# Altium PCB PCB_DMEM_Mezzanine.PcbDoc (part 2 of 4)
Units mil, origin at the board's own origin, x right, y up, seen from the top; angles counter-clockwise.
Board outline 2250 x 3200 mil, 6 copper layers (Top Layer - Signal, AGND-L1, Int. Signal, Power-GND, AGND-D.Sig., Bottom Layer - Signal), stack 32.112 mil thick; 443 components, 241 nets, 1099 pads, 545 vias.
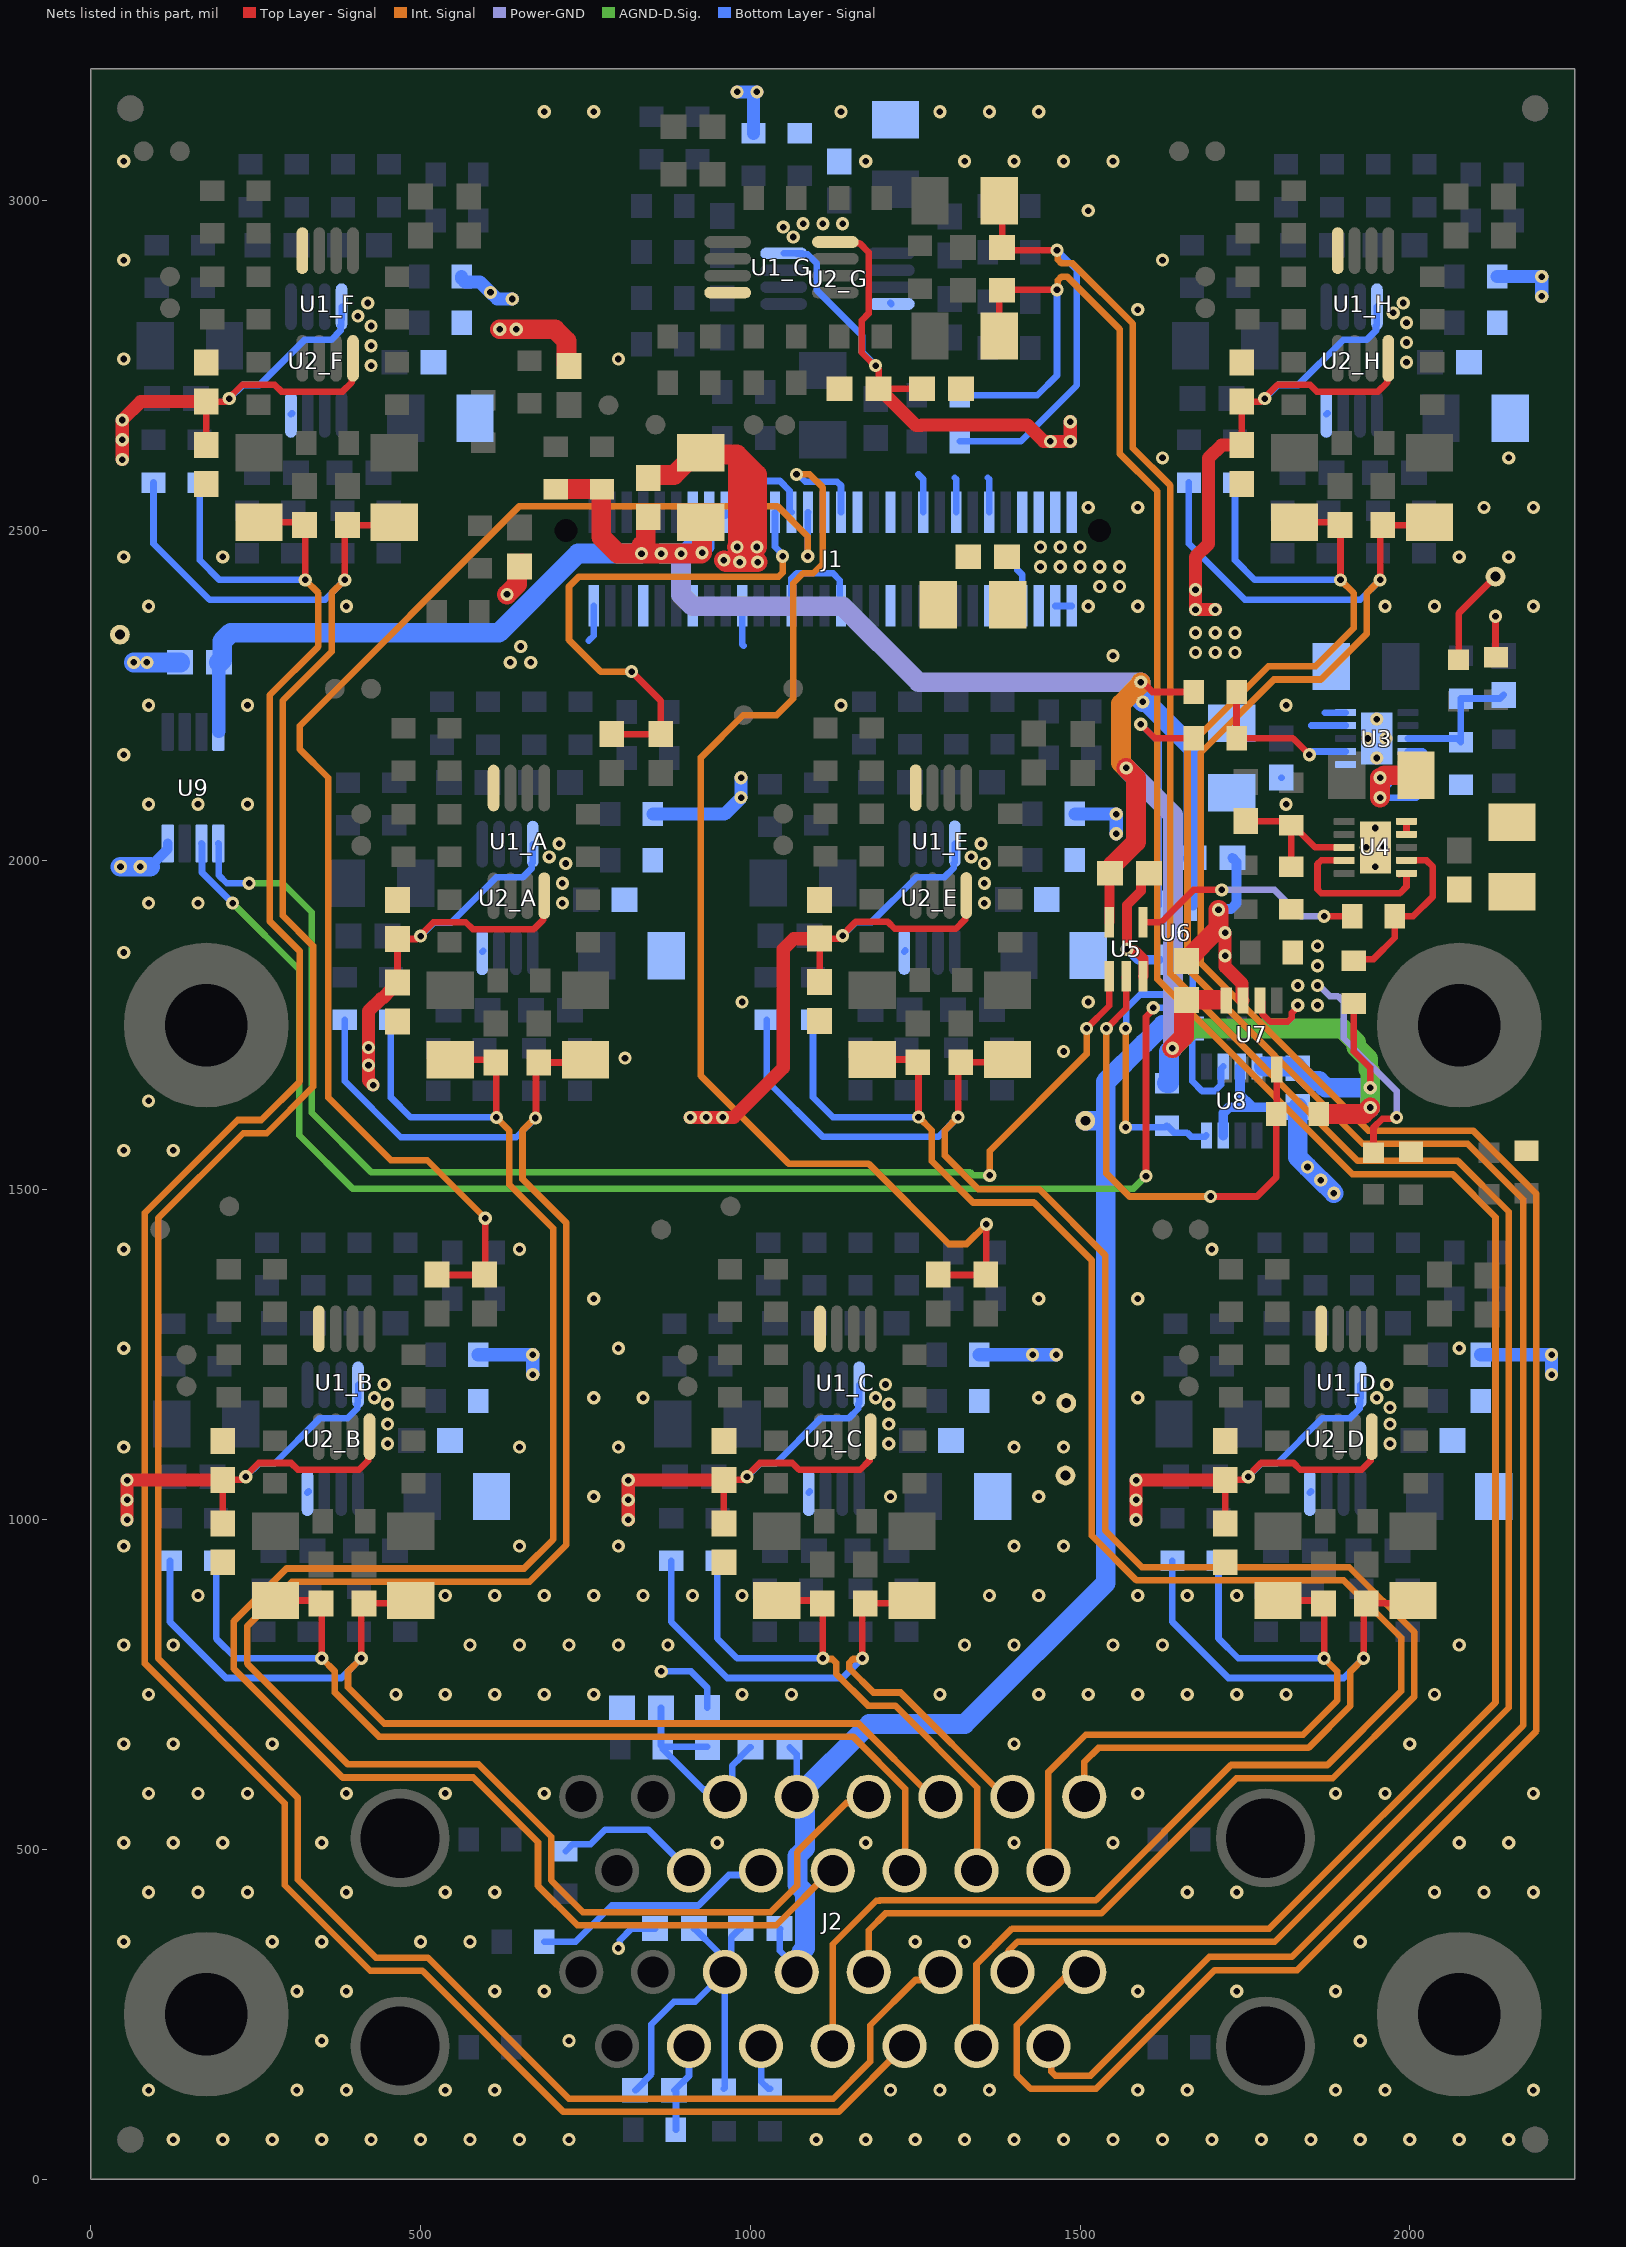
[diagram p6: the nets of this part, all layers, seen from the top]

## Components (designator, comment, footprint, x,y, rotation, side; value= is the part's Value field where it differs from the comment) (continued)
TP6 "testPoint_throughHole" testPoint_ThroughHole 1478,1067 r90 top
TP7 "testPoint_throughHole" testPoint_ThroughHole 2130,2430 r90 top
TP8 "testPoint_throughHole" testPoint_ThroughHole 44,2342 r90 top
TP9 "testPoint_throughHole" testPoint_ThroughHole 1479,1177 r90 top
U1_A "ADA4896-2ARMZ" ADI-RM-8_N 649.09,2027.72 r270 top (schematic designator U1)
U1_B "ADA4896-2ARMZ" ADI-RM-8_N 384.09,1207.72 r270 top (schematic designator U1)
U1_C "ADA4896-2ARMZ" ADI-RM-8_N 1144.09,1207.72 r270 top (schematic designator U1)
U1_D "ADA4896-2ARMZ" ADI-RM-8_N 1904.09,1207.72 r270 top (schematic designator U1)
U1_E "ADA4896-2ARMZ" ADI-RM-8_N 1289.09,2028.19 r270 top (schematic designator U1)
U1_F "ADA4896-2ARMZ" ADI-RM-8_N 359.09,2842.72 r270 top (schematic designator U1)
U1_G "ADA4896-2ARMZ" ADI-RM-8_N 1047.28,2899.09 r0 top (schematic designator U1)
U1_H "ADA4896-2ARMZ" ADI-RM-8_N 1929.09,2842.72 r270 top (schematic designator U1)
U2_A "ADA4896-2ARMZ" ADI-RM-8_N 631.81,1942.72 r90 bottom (schematic designator U2)
U2_B "ADA4896-2ARMZ" ADI-RM-8_N 366.81,1122.72 r90 bottom (schematic designator U2)
U2_C "ADA4896-2ARMZ" ADI-RM-8_N 1126.81,1122.72 r90 bottom (schematic designator U2)
U2_D "ADA4896-2ARMZ" ADI-RM-8_N 1886.81,1122.72 r90 bottom (schematic designator U2)
U2_E "ADA4896-2ARMZ" ADI-RM-8_N 1271.81,1943.19 r90 bottom (schematic designator U2)
U2_F "ADA4896-2ARMZ" ADI-RM-8_N 341.81,2757.72 r90 bottom (schematic designator U2)
U2_G "ADA4896-2ARMZ" ADI-RM-8_N 1132.28,2881.81 r180 bottom (schematic designator U2)
U2_H "ADA4896-2ARMZ" ADI-RM-8_N 1911.81,2757.72 r90 bottom (schematic designator U2)
U3 "TPS7A9001DSKR" SON50P250X250X80-11N 1950,2184.53 r180 bottom
U4 "TPS7A9001DSKR" SON50P250X250X80-11N 1947.76,2019.37 r0 top
U5 "SN74LVC1G08DCKR" DCK5 1570,1865 r90 top
U6 "SN74LVC1G08DCKR" DCK5 1645,1890 r90 bottom
U7 "INA232AIDDFR" SOT_32AIDDFR_TEX 1760,1735 r270 top
U8 "INA232AIDDFR" SOT_32AIDDFR_TEX 1730,1635 r270 bottom
U9 "TCA9536DGKR" SOP65P490X110-8N 155,2110 r90 bottom

## Footprints (in the part's own frame and the unit in brackets; to place one, negate y for a bottom-side part, rotate by r counter-clockwise, add the part's x,y. Pads: shape width x height; smd on the part's side, far side on the other; paste and mask are expansions set on the pad)
189-015-513R571 [mil]
  round 67 / inner round 60 / far side round 67 hole 47 paste-99999 mask+0: 1(381.5,189) 2(272.5,189) 3(163.5,189) 4(54.5,189) 5(-54.5,189) 6(-163.5,189) 7(-272.5,189) 9(327,77) 10(218,77) 11(109,77) 12(0,77) 13(-109,77) 14(-218,77) 15(-327,77) 16(381.5,-77) 17(272.5,-77) 18(163.5,-77) 19(54.5,-77) 20(-54.5,-77) 21(-163.5,-77) 22(-272.5,-77) 24(327,-189) 25(218,-189) 26(109,-189) 27(0,-189) 28(-109,-189) 29(-218,-189) 30(-327,-189)
  round 67 hole 47 paste-99999 mask+0: 8(-381.5,189) 23(-381.5,-77)
  round 150 hole 120 paste-99999 mask-60: 31(-656,-189) 32(656,-189) 33(-656,126) 34(656,126)
  silkscreen extent -780,-388 820,374, body extent -774,-746 774,255, height 1120
ADI-RM-8_N [mm] "SOP, 8-Leads, Body 3x3mm, Pitch 0.65mm, IPC Medium Density"
  oval 1.8x0.45 smd: 1(-2.075,0.975) 2(-2.075,0.325) 3(-2.075,-0.325) 4(-2.075,-0.975) 5(2.075,-0.975) 6(2.075,-0.325) 7(2.075,0.325) 8(2.075,0.975)
  silkscreen extent -2.2,-1.6 0.77,1.88, body extent -2.58,-1.6 2.58,1.6, height 1.09
CAPC1608X09N [mm] "Chip Capacitor, 2-Leads, Body 1.60x0.80mm, IPC Medium Density"
  rect 1x0.95 smd: 1(-0.75,0) 2(0.75,0)
  body extent -0.85,-0.45 0.85,0.45, height 0.9
CAPC3216X190N [mm]
  rect 1.44x1.82 smd: 1(-1.336,0) 2(1.336,0)
  silkscreen extent -0.29,-0.9 0.29,0.9, body extent -1.6,-0.8 1.6,0.8, height 1.9
DCK5 [mil]
  rect 46x14 smd paste-23 mask-23: 1(-41,25.59) 2(-41,0) 3(-41,-25.59) 4(41,-25.59) 5(41,25.59)
  silkscreen extent -9,-42 28,42, body extent -47,-43 47,43, height 43
LSS-130-XX-XX-DV-A [mm]
  rect 0.4x1.6 smd mask+0.05: 1(9.207,-1.8) 2(9.207,1.8) 3(8.572,-1.8) 4(8.572,1.8) 5(7.938,-1.8) 6(7.938,1.8) 7(7.302,-1.8) 8(7.302,1.8) 9(6.667,-1.8) 10(6.667,1.8) 11(6.032,-1.8) 12(6.032,1.8) 13(5.397,-1.8) 14(5.397,1.8) 15(4.763,-1.8) 16(4.763,1.8) 17(4.127,-1.8) 18(4.127,1.8) 19(3.492,-1.8) 20(3.492,1.8) 21(2.857,-1.8) 22(2.858,1.8) 23(2.222,-1.8) 24(2.223,1.8) 25(1.587,-1.8) 26(1.588,1.8) 27(0.952,-1.8) 28(0.953,1.8) 29(0.317,-1.8) 30(0.318,1.8) 31(-0.318,-1.8) 32(-0.317,1.8) 33(-0.953,-1.8) 34(-0.952,1.8) 35(-1.588,-1.8) 36(-1.587,1.8) 37(-2.223,-1.8) 38(-2.222,1.8) 39(-2.858,-1.8) 40(-2.857,1.8) 41(-3.492,-1.8) 42(-3.492,1.8) 43(-4.127,-1.8) 44(-4.127,1.8) 45(-4.763,-1.8) 46(-4.763,1.8) 47(-5.397,-1.8) 48(-5.397,1.8) 49(-6.032,-1.8) 50(-6.032,1.8) 51(-6.667,-1.8) 52(-6.667,1.8) 53(-7.302,-1.8) 54(-7.302,1.8) 55(-7.938,-1.8) 56(-7.938,1.8) 57(-8.572,-1.8) 58(-8.572,1.8) 59(-9.207,-1.8) 60(-9.207,1.8)
  round 0 hole 0.89 unplated: MH1(10.275,1.1) MH2(-10.275,1.1)
  silkscreen extent -12.4,-2.85 12.4,2.85, body extent -11.9,-2.41 11.9,2.19, height 7.45
RESC1608X08N [mm] "Chip Resistor, 2-Leads, Body 1.60x0.81mm, IPC Medium Density"
  rect 0.75x0.9 smd: 1(-0.85,0) 2(0.85,0)
  silkscreen extent -0.1,-0.35 0.1,0.35, body extent -0.85,-0.46 0.85,0.46, height 0.75
RESC1608X55N [mm]
  rect 0.79x0.93 smd: 1(-0.82,0) 2(0.82,0)
  silkscreen extent -0.11,-0.45 0.11,0.45
SON50P250X250X80-11N [mm]
  rrect25% 0.81x0.27 smd: 1(-1.2,1) 2(-1.2,0.5) 3(-1.2,0) 4(-1.2,-0.5) 5(-1.2,-1) 6(1.2,-1) 7(1.2,-0.5) 8(1.2,0) 9(1.2,0.5) 10(1.2,1)
  round 0.508 hole 0.254 mask+0: 11(-0.35,0) 11(0,-0.75) 11(0,0.75) 11(0.35,0)
  rect 1.2x2 smd paste-2: 11(0,0)
  silkscreen extent -2.32,-1.46 1.25,1.46, body extent -1.25,-1.23 1.25,1.27, height 0.75
SOP65P490X110-8N [mm]
  rrect25% 1.47x0.48 smd mask+0: 1(-2.15,0.975) 2(-2.15,0.325) 3(-2.15,-0.325) 4(-2.15,-0.975) 5(2.15,-0.975) 6(2.15,-0.325) 7(2.15,0.325) 8(2.15,0.975)
  silkscreen extent -3.72,-1.54 1.5,1.54, body extent -2.45,-1.5 2.45,1.5, height 1.1
SOT_32AIDDFR_TEX [mil]
  rect 39.5x17 smd paste+0 mask+0: 1(-52.25,38.39) 2(-52.25,12.8) 3(-52.25,-12.8) 4(-52.25,-38.39) 5(52.25,-38.39) 6(52.25,-12.8) 7(52.25,12.8) 8(52.25,38.39)
  silkscreen extent -38,-63 38,63, body extent -58,-58 58,58, height 43
testPoint_pad [mil]
  round 30 smd: 0(0,0)
testPoint_ThroughHole [mil]
  round 30 hole 15: 0(0,0)
WL-SMCW_0603_150060xx75000 [mm] "SMD Mono-color Chip LED, body 1.60 x 0.80 mm"
  rect 0.8x0.8 smd: 1(-0.8,0) 2(0.8,0)
  silkscreen extent -1.55,-0.4 -1.4,0.4, body extent -0.8,-0.4 0.8,0.4, height 0.7

## Part data
C1_A C1_B C1_C C1_D C1_E C1_F C1_G C1_H C7 C10_A C10_B C10_C C10_D C10_E C10_F C10_G C10_H C12_A C12_B C12_C C12_D C12_E C12_F C12_G C12_H C20 C21 C22 C25 C26: library part Capacitor, "10 µF ±10% 100V Ceramic Capacitor X6S 1206 (3216 Metric)", MP=C3216X6S2A106K160AC
C2_A C2_B C2_C C2_D C2_E C2_F C2_G C2_H C3_A C3_B C3_C C3_D C3_E C3_F C3_G C3_H C4_A C4_B C4_C C4_D C4_E C4_F C4_G C4_H C6_A C6_B C6_C C6_D C6_E C6_F C6_G C6_H C8 C9_A C9_B C9_C C9_D C9_E C9_F C9_G C9_H C11_A C11_B C11_C C11_D C11_E C11_F C11_G C11_H C17 C18 C19 C27 C28 C29 C30 C31 C32 C33 C34 C35 C36 C37 C41_A C41_B C41_C C41_D C41_E C41_F C41_G C41_H: library part Capacitor, "0.1 µF ±10% 100V Ceramic Capacitor X7R 0603 (1608 Metric)", MP=CC0603KRX7R0BB104
C5_A C5_B C5_C C5_D C5_E C5_F C5_G C5_H: library part Capacitor, "10 µF ±10% 10V Ceramic Capacitor X5R 1206 (3216 Metric)", MP=CL31A106KPHNNNE
C13_A C13_B C13_C C13_D C13_E C13_F C13_G C13_H C14_A C14_B C14_C C14_D C14_E C14_F C14_G C14_H C15_A C15_B C15_C C15_D C15_E C15_F C15_G C15_H C16_A C16_B C16_C C16_D C16_E C16_F C16_G C16_H: library part Capacitor, "68 pF ±1% 100V Ceramic Capacitor C0G, NP0 0603 (1608 Metric)", MP=GCM1885C2A680FA16D
C23 C24: library part Capacitor, "10000 pF ±10% 50V Ceramic Capacitor X7R 0603 (1608 Metric)", MP=0603B103K500CT
C38 C39: library part Capacitor, "100 pF ±5% 50V Ceramic Capacitor C0G, NP0 0603 (1608 Metric)", MP=GRM1885C1H101JA01D
C40_A C40_B C40_C C40_D C40_E C40_F C40_G C40_H: library part Capacitor, "10 µF ±10% 10V Ceramic Capacitor X5R 0603 (1608 Metric)", MP=CL10A106KP8NNNC
D1 D2 D3: "WL-SMCW Mono-color Chip LED Waterclear, SMT, size 0603, Red, 2V, 140°", Case/Size Code=0603, Emitting Color=Red, Forward Voltage=2V, Manufacturer="Wurth Elektronik", Operating Temperature Max=85°C, Operating Temperature Min=-40°C, Category="Signal LEDs", Chip Technology=AlInGaP, ComponentLink1Description="Website Link", ComponentLink1URL=https://www.we-online.com/redexpert/article/150060RS75000?ad, ComponentLink2Description="Datasheet Link", ComponentLink2URL=https://www.we-online.com/redexpert/spec/150060RS75000?ad, Dominant Wavelength=625nm, Height=0.7mm, Length=1.6mm, Luminous Intensity=250mcd, Manufacturer Part Number=150060RS75000, Match Code=WL-SMCW, Mount="Surface Mount", Packaging="Tape and Reel", Peak Wavelength=630nm, Viewing Angle=140°, Width=0.8mm
F1 F2: library part Fuse, "200 mA AC 32 V DC Fuse Board Mount (Cartridge Style Excluded) Surface Mount 0603 (1608 Metric)", MP=F0603G0R20FNTR
J1: library part LSS-130-XX-XX-DV-A, "0.635MM TERMINAL/SOCKET COMB, 60 PINS.", Manufacturer=SAMTEC, CREATED="May 11, 2015 - Wendy Xin", PCB DECAL=LSS-130-XX-XX-DV-A
J2: "15, 15 Position D-Sub - Stacked Receptacle, Female Sockets Connector", MP=189-015-513R571
R1_A R1_B R1_C R1_D R1_E R1_F R1_G R1_H R3_A R3_B R3_C R3_D R3_E R3_F R3_G R3_H R42 R43 R46 R47: library part Resistor, "10 kOhms ±1% 0.1W, 1/10W Chip Resistor 0603 (1608 Metric) Moisture Resistant Thick Film", Package=None, Availability=Unavailable, MP=RC0603FR-0710KL, Price=None
R2_A R2_B R2_C R2_D R2_E R2_F R2_G R2_H R11_A R11_B R11_C R11_D R11_E R11_F R11_G R11_H: library part Resistor, "510 Ohms ±0.1% 0.1W, 1/10W Chip Resistor 0603 (1608 Metric) Thin Film", Package=None, Availability=Unavailable, MP=RT0603BRD07510RL, Price=None
R4_A R4_B R4_C R4_D R4_E R4_F R4_G R4_H R6_A R6_B R6_C R6_D R6_E R6_F R6_G R6_H R7_A R7_B R7_C R7_D R7_E R7_F R7_G R7_H R8_A R8_B R8_C R8_D R8_E R8_F R8_G R8_H R12_A R12_B R12_C R12_D R12_E R12_F R12_G R12_H R13_A R13_B R13_C R13_D R13_E R13_F R13_G R13_H R14_A R14_B R14_C R14_D R14_E R14_F R14_G R14_H R18_A R18_B R18_C R18_D R18_E R18_F R18_G R18_H R35 R36 R41: library part Resistor, "1 kOhms ±0.1% 0.1W, 1/10W Chip Resistor 0603 (1608 Metric) Thin Film", Package=None, Availability=Unavailable, MP=RT0603BRD071KL, Price=None
R5_A R5_B R5_C R5_D R5_E R5_F R5_G R5_H: library part Resistor, "110 Ohms ±0.1% 0.1W, 1/10W Chip Resistor 0603 (1608 Metric) Thin Film", Package=None, Availability=Unavailable, MP=RT0603BRD07110RL, Price=None
R9_A R9_B R9_C R9_D R9_E R9_F R9_G R9_H R10_A R10_B R10_C R10_D R10_E R10_F R10_G R10_H R15_A R15_B R15_C R15_D R15_E R15_F R15_G R15_H R24_A R24_B R24_C R24_D R24_E R24_F R24_G R24_H R29 R30 R31 R32 R33 R34 R37 R38 R39 R40 R50 R51 R52 R53: library part Resistor, "0 Ohms Jumper Chip Resistor 0603 (1608 Metric) Automotive AEC-Q200 Thick Film", Package=None, Availability=Unavailable, MP=RMCF0603ZT0R00, Price=None
R16_A R16_B R16_C R16_D R16_E R16_F R16_G R16_H: library part Resistor, "50 Ohms ±0.1% 0.1W, 1/10W Chip Resistor 0603 (1608 Metric) Thin Film", Package=None, Availability=Unavailable, MP=RT0603BRE0750RL, Price=None
R17_A R17_B R17_C R17_D R17_E R17_F R17_G R17_H: library part Resistor, "22 kOhms ±0.1% 0.1W, 1/10W Chip Resistor 0603 (1608 Metric) Thin Film", Package=None, Availability=Unavailable, MP=RT0603BRE0722KL, Price=None
R19_A R19_B R19_C R19_D R19_E R19_F R19_G R19_H: library part Resistor, "3.3 kOhms ±0.1% 0.1W, 1/10W Chip Resistor 0603 (1608 Metric) Thin Film", Package=None, Availability=Unavailable, MP=RT0603BRD073K3L, Price=None
R20_A R20_B R20_C R20_D R20_E R20_F R20_G R20_H: library part Resistor, "200 Ohms ±0.1% 0.1W, 1/10W Chip Resistor 0603 (1608 Metric) Thin Film", Package=None, Availability=Unavailable, MP=RT0603BRD07200RL, Price=None
R21_A R21_B R21_C R21_D R21_E R21_F R21_G R21_H: library part Resistor, "43 kOhms ±0.1% 0.1W, 1/10W Chip Resistor 0603 (1608 Metric) Thin Film", Package=None, Availability=Unavailable, MP=RT0603BRD0743KL, Price=None
R22_A R22_B R22_C R22_D R22_E R22_F R22_G R22_H: library part Resistor, "2.7 kOhms ±0.1% 0.1W, 1/10W Chip Resistor 0603 (1608 Metric) Thin Film", Package=None, Availability=Unavailable, MP=RT0603BRD072K7L, Price=None
R23_A R23_B R23_C R23_D R23_E R23_F R23_G R23_H: library part Resistor, "1.8 kOhms ±0.1% 0.1W, 1/10W Chip Resistor 0603 (1608 Metric) Thin Film", Package=None, Availability=Unavailable, MP=RT0603BRD071K8L, Price=None
R25: library part Resistor, "3.57 kOhms ±1% 0.1W, 1/10W Chip Resistor 0603 (1608 Metric) Automotive AEC-Q200 Thick Film", Package=None, Availability=Unavailable, MP=RMCF0603FT3K57, Price=None
R26: library part Resistor, "10.5 kOhms ±1% 0.1W, 1/10W Chip Resistor 0603 (1608 Metric) Automotive AEC-Q200 Thick Film", Package=None, Availability=Unavailable, MP=RMCF0603FT10K5, Price=None
R27: library part Resistor, "1.15 kOhms ±1% 0.1W, 1/10W Chip Resistor 0603 (1608 Metric) Automotive AEC-Q200 Thick Film", Package=None, Availability=Unavailable, MP=RMCF0603FT1K15, Price=None
R28: library part Resistor, "2 kOhms ±1% 0.1W, 1/10W Chip Resistor 0603 (1608 Metric) Automotive AEC-Q200 Thick Film", Package=None, Availability=Unavailable, MP=ERJ-3EKF2001V, Price=None
R44: library part Resistor, "300 mOhms ±1% 0.1W, 1/10W Chip Resistor 0603 (1608 Metric) Automotive AEC-Q200 Thick Film", Package=None, Availability=Unavailable, MP=ERJ-3RQFR30V, Price=None
R45: library part Resistor, "36 mOhms ±1% 0.333W, 1/3W Chip Resistor 0603 (1608 Metric) Automotive AEC-Q200, Current Sense Thick Film", Package=None, Availability=Unavailable, MP=ERJ-3BWFR036V, Price=None
R48 R49 R54 R55: library part Resistor, "100 Ohms ±1% 0.1W, 1/10W Chip Resistor 0603 (1608 Metric) Moisture Resistant Thick Film", Package=None, Availability=Unavailable, MP=RC0603FR-07100RL, Price=None
U1_A U1_B U1_C U1_D U1_E U1_F U1_G U1_H U2_A U2_B U2_C U2_D U2_E U2_F U2_G U2_H: library part CMP-0384-01715-1, "Double Channel Low Wide Band Noise Operational Amplifier, 230 MHz BW, 120 V/us SR, Industrial, 8-pin SOP (RM-8), Tube", Amplifiers Per Package=2, Generic Part Number=ADA4896-2, Input Bias Current=11uA, Input Offset Voltage=28uV, Manufacturer="Analog Devices", Code_JEDEC=MO-187-AA, ComponentLink1Description="Manufacturer URL", ComponentLink1URL=http://www.analog.com/en/index.html, ComponentLink2Description=Datasheet, ComponentLink2URL=http://www.analog.com/static/imported-files/data_sheets/ADA4896-2_4897-1_4897-2.PDF, ComponentLink3Description="Package Specification", ComponentLink3URL=http://www.analog.com/static/imported-files/packages/PKG_PDF/MSOP%28RM%29/RM_8.pdf, DatasheetVersion="Rev. B", Iq/Amp=3mA, Mounting Technology="Surface Mount", PackageDescription="8-Pin Mini Small Outline Package, Body 3 x 3 mm, Pitch 0.65 mm", PackageReference=RM-8, Packing=Tube, PartNumber=ADA4896-2ARMZ, Slew Rate=120V/us, Small Signal Bandwidth=230MHz, V Span Max=10V, V Span Min=3V
U3 U4: "500-mA, low-noise, high-PSRR, adjustable ultra-low-dropout voltage regulator with high-accuracy 10-SON -40 to 125", Package="WSON-10 Texas Instruments", Availability="In Stock", Check_prices=https://www.snapeda.com/parts/TPS7A9001DSKR/Texas+Instruments/view-part/?ref=eda, MF="Texas Instruments", MP=TPS7A9001DSKR, Price=None, Purchase-URL=https://pricing.snapeda.com/search/part/TPS7A9001DSKR/?ref=eda, SnapEDA_Link=https://www.snapeda.com/parts/TPS7A9001DSKR/Texas+Instruments/view-part/?ref=snap
U5 U6: "AND Gate IC 1 Channel SC-70-5", Mfr_Name="Texas Instruments", RefDes=RefDes, Type=Type
U7 U8: "Current Monitor Regulator High/Low-Side TSOT-23-8", Mfr_Name="Texas Instruments", RefDes=RefDes, Type=Type
U9: "Remote 4-Bit IÂ²C and SMBus I/O expander with configuration registers", Package=None, Availability="In Stock", Check_prices=https://www.snapeda.com/parts/TCA9536DGKR/Texas+Instruments/view-part/?ref=eda, MF="Texas Instruments", MP=TCA9536DGKR, Price=None, Purchase-URL=https://pricing.snapeda.com/search/part/TCA9536DGKR/?ref=eda, SnapEDA_Link=https://www.snapeda.com/parts/TCA9536DGKR/Texas+Instruments/view-part/?ref=snap

## Free pads (board coordinates)
  round 40 smd far side paste-99999 mask+4: ""(60,60) ""(60,3140) ""(2190,60) ""(2190,3140)
  round 40 smd paste-99999 mask-99999: ""(60,60) ""(2190,60) ""(2190,3140)
  round 40 smd mask-99999: ""(60,3140)
  round 250 hole 125: ""(175,250) ""(175,1750) ""(2075,250) ""(2075,1750)

## Via types
v1: diameter 20, hole 10, Top Layer - Signal to Bottom Layer - Signal, 545 vias

## Nets (pads, with @x,y where several pads share a name; then routed paths per layer and width w, separated by ;. In a path a pad name is that pad's centre, name@x,y a point inside that pad or via, vN(x,y) a via of type N, cw(c..) or ccw(c..) an arc to the next point about the centre after c; other vN are vias at no path point)
3V3VDPS: C7.1 C8.2 C17.1 C18.1 C35.2 C36.2 C37.1 J1.14 J1.16 R42.2 R43.2 R46.2 R47.2 R51.2 R53.2 U5.5 U6.5 U7.4 U8.4 U9.8 | length 4617
  Top Layer - Signal w10: v1(1592,2270) 1594.71,2270 1609.71,2255 R53.2@1672.72,2255 ; R51.2@1915,1782.72 1915,1710 1940,1685 v1(1940,1655)
  Top Layer - Signal w15: U5.5@1544.94,1906.53 C17.1@1544.94,1979.47
  Top Layer - Signal w30: R42.2@705,2562.72 R43.2@775,2562.72 ; R43.2@774.55,2562.72 774,2562.17 774,2490 799,2465 v1(835,2465) ; C8.2@845,2520.47 841.3,2516.77 841.3,2483.73 835,2477.43 v1(835,2465) ; v1@925.59,2465 v1(895,2465) v1(865,2465) v1(835,2465) ; v1(926.87,2466.27) C7.1@926.87,2510.54 ; C17.1@1544.94,1979.47 C17.1@1545.47,1980 ; C17.1@1546.3,1980 1550,1983.7 1550,1992.57 1585,2027.57 1585,2125 v1(1570,2140) ; v1(1640,1715) 1657.6,1732.6 1657.6,1784.62 C36.2@1661.3,1788.32 1709.68,1788.32 ; R46.2@1862.28,1615 1930,1615 v1(1940,1625)
  AGND-D.Sig. w30: v1(1640,1715) 1670,1745 1897.43,1745 1918.71,1723.71 1918.71,1716.64 1937,1698.36 1937,1682.94 1940,1679.94 v1(1940,1655) v1(1940,1625)
  Int. Signal w30: v1(1570,2140) 1562.11,2147.89 1562.11,2237.11 1592,2267 v1(1592,2270)
  Power-GND w30: v1(865,2465) v1(895,2465) 895,2402.57 912.57,2385 1140,2385 1255,2270 v1(1592,2270) ; v1(1570,2140) 1641.08,2068.92 1641.08,1716.08 v1(1640,1715)
  Bottom Layer - Signal w15: U6.5@1671.19,1931.6 C18.1@1671.19,2003.08
  Bottom Layer - Signal w17: 912,2482 J1.14@912,2527.06 ; 937.5,2474.46 J1.16@937.5,2527.56
  Bottom Layer - Signal w20: U9.8@193.96,2195.22 C37.1@193.96,2299.43 ; 912,2482 v1(895,2465) 925.59,2465 935.05,2474.46
  Bottom Layer - Signal w30: C37.1@194.53,2300 195.51,2300 199.21,2303.7 199.21,2332.11 212.1,2345 618.64,2345 738.64,2465 v1(835,2465) ; v1(865,2465) v1(895,2465) ; v1(1592,2270) 1592,2243 v1(1595,2240) 1600.57,2240 1671.79,2168.78 C18.1@1671.79,2003.68 C18.1@1671.19,2003.08 ; R47.2@1631.69,1662.11 1634.45,1662.11 1635,1662.66 1635,1710 v1(1640,1715) ; 1779,1687 1827.53,1687 C35.2@1830,1684.53 ; C35.2@1830,1683.54 1848.39,1665.16 1862.42,1665.16 1872.57,1655 v1(1940,1655) v1(1940,1625)
+5V3A: C19.2 C20.1 C21.1 C22.1 D3.2 J1.58 J1.60 TP7.0 U3.9 U3.10 U4.9 U4.10 | length 252.6
  Top Layer - Signal w10: U4.9@1995,2039.06 U4.10@1995,2058.74 ; D3.2@2073.99,2303.88 2073.99,2373.99 TP7.0@2130,2430
  Bottom Layer - Signal w10: 1850.79,2204.21 U3.9@1902.76,2204.21 ; 1871.1,2223.9 U3.10@1902.76,2223.9
  other v1: 1675,2315 1705,2315 1735,2315 1675,2345 1705,2345 1735,2345 1530,2415 1560,2415 1440,2445 1470,2445 1500,2445 1530,2445 1560,2445 1440,2475 1470,2475 1500,2475
-5V3A: J1.57 J1.59 | length 25
  Bottom Layer - Signal w10: J1.57@1462.5,2385.44 J1.59@1487.5,2385.44
AGND: C3_A.1 C3_B.1 C3_C.1 C3_D.1 C3_E.1 C3_F.1 C3_G.1 C3_H.1 C4_A.1 C4_B.1 C4_C.1 C4_D.1 C4_E.1 C4_F.1 C4_G.1 C4_H.1 C5_A.1 C5_B.1 C5_C.1 C5_D.1 C5_E.1 C5_F.1 C5_G.1 C5_H.1 C6_A.1 C6_B.1 C6_C.1 C6_D.1 C6_E.1 C6_F.1 C6_G.1 C6_H.1 C19.1 C20.2 C21.2 C22.2 C25.2 C26.2 C27.1 C28.1 C29.1 C31.1 J1.1 J1.7 J1.13 J1.19 J1.22 J1.25 J1.26 J1.30 J1.31 J1.34 J1.37 J1.38 J1.42 J1.43 J1.46 J1.49 J1.50 J1.51 J1.53 J1.54 J1.55 J1.56 J2.14 J2.29 R3_A.1 R3_B.1 R3_C.1 R3_D.1 R3_E.1 R3_F.1 R3_G.1 R3_H.1 R27.1 R28.1 R29.1 R30.1 R35.1 R36.1 R41.1 TP9.0 U1_A.4 U1_B.4 U1_C.4 U1_D.4 U1_E.4 U1_F.4 U1_G.4 U1_H.4 U2_A.4 U2_B.4 U2_C.4 U2_D.4 U2_E.4 U2_F.4 U2_G.4 U2_H.4 U3.4 U3.6 U3.11 U4.4 U4.6 U4.11 | length 1596.4
  Top Layer - Signal w10: U1_F.4@322.44,2922.68 U1_F.4@320.71,2924.41 U1_F.4@322.44,2924.41 ; U1_B.4@347.44,1287.68 U1_B.4@345.71,1289.41 U1_B.4@347.44,1289.41 ; U1_A.4@612.44,2107.68 U1_A.4@610.71,2109.41 U1_A.4@612.44,2109.41 ; U1_G.4@965.59,2862.44 U1_G.4@965.59,2860.71 U1_G.4@967.32,2862.44 ; U1_C.4@1107.44,1287.68 U1_C.4@1105.71,1289.41 U1_C.4@1107.44,1289.41 ; U1_E.4@1252.44,2108.15 U1_E.4@1250.71,2109.88 U1_E.4@1252.44,2109.88 ; U1_D.4@1867.44,1287.68 U1_D.4@1865.71,1289.41 U1_D.4@1867.44,1289.41 ; U1_H.4@1892.44,2922.68 U1_H.4@1890.71,2924.41 U1_H.4@1892.44,2924.41 ; U4.4@1900.51,1999.69 1900.2,2000 1865.86,2000 1860,1994.14 1860,1955.86 1865.86,1950 1985,1950 1995,1960 U4.6@1995,1980 1984.37,1980 1984.06,1979.68 U4.6@1984.06,1978.53 ; C26.2@2009.34,2121.5 C26.2@2009.34,2128.98 ; C28.1@2075,1955.47 C28.1@2075,1956.46 ; v1(2130,2370) 2130,2308.78 R41.1@2130.91,2307.87
  Top Layer - Signal w20: C28.1@2075,1954.49 C28.1@2075,1955.47 ; C21.2@2147.52,1952.4 C21.2@2155,1952.4
  Top Layer - Signal w30: v1(1955,2095) v1(1955,2125) ; v1@1961.69,2128.98 C26.2@2009.34,2128.98
  Bottom Layer - Signal w10: U2_F.4@304.9,2677.5 U2_F.4@303.43,2676.02 U2_F.4@305.16,2677.76 ; U2_B.4@329.9,1042.5 U2_B.4@328.43,1041.02 U2_B.4@330.16,1042.76 ; U2_A.4@594.9,1862.5 U2_A.4@593.43,1861.02 U2_A.4@595.16,1862.76 ; R29.1@720,497.28 730.55,507.83 757.83,507.83 780,530 845,530 J2.14@907,468 ; 755,2333 762.5,2340.5 J1.1@762.5,2385.83 ; C31.1@884.53,135 887.28,132.24 R30.1@887.28,75 ; C31.1@885.51,135 907,156.49 J2.29@907,202 ; J1.19@987.5,2385.83 987.5,2327.5 990,2325 ; 1025,2575 1045,2575 1059.63,2560.37 1059.63,2530.43 J1.26@1062.5,2527.56 ; J1.25@1062.5,2385.44 1062.5,2427.31 1070.19,2435 1125.35,2435 1135.72,2424.63 1135.72,2387.22 J1.31@1137.5,2385.44 ; U2_C.4@1089.9,1042.5 U2_C.4@1088.43,1041.02 U2_C.4@1090.16,1042.76 ; U2_G.4@1212.24,2845.16 U2_G.4@1213.98,2843.43 U2_G.4@1212.5,2844.9 ; U2_E.4@1234.9,1862.97 U2_E.4@1233.43,1861.5 U2_E.4@1235.16,1863.23 ; 1255,2585 1262.5,2577.5 J1.42@1262.5,2527.56 ; 1310,2580 1312.5,2577.5 J1.46@1312.5,2527.56 ; 1360,2580 1362.5,2577.5 J1.50@1362.5,2527.56 ; 1405,2440 1412.5,2432.5 J1.53@1412.5,2385.83 ; U2_D.4@1849.9,1042.5 U2_D.4@1848.43,1041.02 U2_D.4@1850.16,1042.76 ; U2_H.4@1874.9,2677.5 U2_H.4@1873.43,2676.02 U2_H.4@1875.16,2677.76 ; v1(1955,2095) 2010,2095 2025,2110 2025,2150 2025.7,2150.7 2025.7,2158.98 2019.84,2164.84 U3.4@1997.24,2164.84 ; v1@1957.71,2125 1968.26,2114.44
  other v1: 125,60 200,60 275,60 350,60 425,60 500,60 575,60 650,60 725,60 1100,60 1175,60 1250,60 1325,60 1400,60 1475,60 1550,60 1625,60 1700,60 1775,60 1850,60 1925,60 2000,60 2075,60 2150,60 87.5,135 312.5,135 387.5,135 537.5,135 612.5,135 1212.5,135 1287.5,135 1362.5,135 1587.5,135 1662.5,135 1887.5,135 1962.5,135 2187.5,135 350,210 725,210 1925,210 312.5,285 387.5,285 612.5,285 687.5,285 1587.5,285 1737.5,285 1887.5,285 50,360 275,360 350,360 500,360 575,360 1250,360 1325,360 1925,360 87.5,435 162.5,435 237.5,435 387.5,435 537.5,435 612.5,435 1662.5,435 1737.5,435 2037.5,435 2112.5,435 2187.5,435 50,510 125,510 200,510 350,510 950,510 1175,510 1400,510 1550,510 2075,510 2150,510 87.5,585 162.5,585 237.5,585 387.5,585 537.5,585 687.5,585 1587.5,585 1887.5,585 1962.5,585 2187.5,585 50,660 125,660 275,660 1400,660 2000,660 87.5,735 462.5,735 537.5,735 612.5,735 687.5,735 762.5,735 987.5,735 1062.5,735 1287.5,735 1437.5,735 1512.5,735 1587.5,735 1662.5,735 1737.5,735 1812.5,735 2037.5,735 50,810 125,810 575,810 650,810 725,810 800,810 875,810 1325,810 1400,810 1550,810 1625,810 2075,810 162.5,885 537.5,885 612.5,885 687.5,885 762.5,885 837.5,885 912.5,885 987.5,885 1362.5,885 1437.5,885 1587.5,885 1662.5,885 1737.5,885 50,960 650,960 800,960 1400,960 1475,960 762.5,1035 1212.5,1035 1437.5,1035 50,1110 650,1110 800,1110 1400,1110 1475,1110 450,1115 1210,1115 1970,1115 450,1145 1210,1145 1970,1145 1970,1170 450,1175 1210,1175 430,1185 762.5,1185 837.5,1185 1190,1185 1437.5,1185 1587.5,1185 1950,1185 445,1205 1205,1205 1965,1205 50,1260 800,1260 2075,1260 762.5,1335 1437.5,1335 1587.5,1335 50,1410 650,1410 1700,1410 50,1560 125,1560 87.5,1635 810,1700 1475,1710 987.5,1785 1512.5,1785 50,1860 87.5,1935 162.5,1935 715,1935 1355,1935 715,1965 1355,1965 720,1995 1355,1995 695,2005 1335,2005 710,2025 1350,2025 87.5,2085 162.5,2085 237.5,2085 1812.5,2085 50,2160 87.5,2235 237.5,2235 1137.5,2235 1812.5,2235 636,2300 667,2300 1550,2310 652,2324 87.5,2385 387.5,2385 1512.5,2385 1587.5,2385 1962.5,2385 2037.5,2385 2187.5,2385 50,2460 200,2460 2075,2460 2150,2460 1512.5,2535 1587.5,2535 2112.5,2535 2187.5,2535 1625,2610 2150,2610 425,2750 1995,2755 50,2760 800,2760 425,2780 1995,2785 425,2810 1995,2815 405,2825 1975,2830 1587.5,2835 420,2845 1990,2845 50,2910 1625,2910 1065,2945 1050,2960 1080,2965 1110,2965 1140,2965 1512.5,2985 50,3060 1175,3060 1325,3060 1400,3060 1475,3060 1550,3060 687.5,3135 762.5,3135 1137.5,3135 1287.5,3135 1362.5,3135 1437.5,3135
ALERT_5V: R46.1 U5.2 U7.8 | length 762.3
  Top Layer - Signal w10: v1(1540,1745) 1570,1775 U5.2@1570,1824 U5.2@1568,1822 ; v1(1698,1490) 1768.28,1490 1797.75,1519.47 R46.1@1797.75,1614.97 ; R46.1@1797.72,1615 1798.39,1615.67 U7.8@1798.39,1682.75
  Int. Signal w10: v1(1540,1745) 1540,1525 1575,1490 v1(1698,1490)
ALERT_CE: R47.1 U6.2 U8.8 | length 444.9
  Int. Signal w10: v1(1569,1595) v1(1569,1745)
  Bottom Layer - Signal w10: v1(1569,1595) 1629.15,1595 R47.1@1631.69,1597.54 1642.24,1586.99 1661.96,1586.99 1668.11,1580.83 1689.7,1580.83 U8.8@1691.61,1582.75 ; v1(1569,1745) 1570,1746 1570,1775 1591.31,1796.31 1639.14,1796.31 1645,1802.16 U6.2@1645,1849
C0_N: C9_A.1 C12_A.1 J2.4 R7_A.1 | length 3102.3
  Top Layer - Signal w10: v1(674.04,1609.04) 675,1610 675,1689.09 C9_A.1@679.09,1693.19 745.79,1693.19 C12_A.1@750,1697.4
  Int. Signal w10: v1(674.04,1609.04) 673.57,1609.04 654.52,1590 654.52,1516.48 721.14,1449.86 721.14,961.86 665.28,906 305,906 237,838 237,782 390,629 588.28,629 698,519.28 698,453 746,405 1031,405 1071,445 1071,496 1145.43,570.43 1169.93,570.43 J2.4@1179.5,580
  Bottom Layer - Signal w10: R7_A.1@385,1757.72 385,1665 470,1580 645,1580 v1(674.04,1609.04)
C0_P: C1_A.1 C2_A.1 J2.12 R12_A.1 | length 2870.3
  Top Layer - Signal w10: C1_A.1@545,1697.4 609.88,1697.4 C2_A.1@614.09,1693.19 615,1692.28 v1(615,1610)
  Int. Signal w10: v1(615,1610) 615,1609.52 634.52,1590 634.52,1508.19 701.14,1441.57 701.14,970.14 657,926 296.72,926 217,846.28 217,773.72 381.72,609 580,609 678,511 678,444.72 737.72,385 1039.28,385 1122.28,468 J2.12@1125,468
  Bottom Layer - Signal w10: R12_A.1@455,1757.72 455,1640 485,1610 v1(615,1610)
C1_N: C9_B.1 C12_B.1 J2.3 R7_B.1 | length 1593.9
  Top Layer - Signal w10: v1(410,790) 410,869.09 C9_B.1@414.09,873.19 480.79,873.19 C12_B.1@485,877.4
  Int. Signal w10: v1(410,790) 390,770 390,746 445,691 1164,691 J2.3@1275,580
  Bottom Layer - Signal w10: R7_B.1@120,937.72 120,845 205,760 380,760 v1(410,790)
C1_P: C1_B.1 C2_B.1 J2.11 R12_B.1 | length 1554.7
  Top Layer - Signal w10: C1_B.1@280,877.4 344.88,877.4 C2_B.1@349.09,873.19 350,872.28 v1(350,790)
  Int. Signal w10: v1(350,790) 370,770 370,737.72 436.72,671 1155.72,671 1235.03,591.69 1235.03,469.03 J2.11@1234,468
  Bottom Layer - Signal w10: R12_B.1@190,937.72 190,820 220,790 v1(350,790)
C2_N: C9_C.1 C12_C.1 J2.2 R7_C.1 | length 947.2
  Top Layer - Signal w10: v1(1170,790) 1170,869.09 C9_C.1@1174.09,873.19 1240.79,873.19 C12_C.1@1245,877.4
  Int. Signal w10: v1(1170,790) 1168.79,788.79 1155.86,788.79 1150,782.93 1150,774.64 1186.64,738 1227.92,738 1385.92,580 J2.2@1397.5,580
  Bottom Layer - Signal w10: R7_C.1@880,937.72 880,845 965,760 1140,760 v1(1170,790)
C2_P: C1_C.1 C2_C.1 J2.10 R12_C.1 | length 895.7
  Top Layer - Signal w10: C1_C.1@1040,877.4 1104.88,877.4 C2_C.1@1109.09,873.19 1110,872.28 v1(1110,790)
  Int. Signal w10: v1(1110,790) 1111.21,788.79 1124.14,788.79 1130,782.93 1130,766.36 1178.36,718 1219.63,718 1344.03,593.6 1344.03,469.03 J2.10@1343,468
  Bottom Layer - Signal w10: R12_C.1@950,937.72 950,820 980,790 v1(1110,790)
C3_N: C9_D.1 C12_D.1 J2.1 R7_D.1 | length 1159.8
  Top Layer - Signal w10: v1(1930,790) 1930,869.09 C9_D.1@1934.09,873.19 2000.79,873.19 C12_D.1@2005,877.4
  Int. Signal w10: J2.1@1506.5,580 1506.5,632.5 1528,654 1846.28,654 1910,717.72 1910,770 v1(1930,790)
  Bottom Layer - Signal w10: R7_D.1@1640,937.72 1640,845 1725,760 1900,760 v1(1930,790)
C3_P: C1_D.1 C2_D.1 J2.9 R12_D.1 | length 1149.2
  Top Layer - Signal w10: C1_D.1@1800,877.4 1864.88,877.4 C2_D.1@1869.09,873.19 1870,872.28 v1(1870,790)
  Int. Signal w10: J2.9@1452,468 1452,617.42 1508.58,674 1838,674 1890,726 1890,770 v1(1870,790)
  Bottom Layer - Signal w10: R12_D.1@1710,937.72 1710,820 1740,790 v1(1870,790)
C4_N: C9_E.1 C12_E.1 J2.19 R7_E.1 | length 3045.7
  Top Layer - Signal w10: v1(1315,1610.47) 1315,1689.57 C9_E.1@1319.09,1693.66 1385.79,1693.66 C12_E.1@1390,1697.87
  Int. Signal w10: J2.19@1179.5,314 1179.5,377.5 1205,403 1532.28,403 1737.28,608 1883.28,608 2007,731.72 2007,829.28 1908.28,928 1594,928 1538,984 1538,1401.28 1438.28,1501 1346,1501 1295,1552 1295,1590.47 v1(1315,1610.47)
  Bottom Layer - Signal w10: R7_E.1@1025,1758.19 1025,1665.47 1110,1580.47 1285,1580.47 v1(1315,1610.47)
C4_P: C1_E.1 C2_E.1 J2.27 R12_E.1 | length 3031.6
  Top Layer - Signal w10: C1_E.1@1185,1697.87 1249.88,1697.87 C2_E.1@1254.09,1693.66 1255,1692.76 v1(1255,1610.47)
  Int. Signal w10: J2.27@1125,202 1125,356.28 1190.86,422.14 1195.86,422.14 1196.72,423 1524,423 1729,628 1875,628 1987,740 1987,821 1900,908 1585.72,908 1518,975.72 1518,1393 1430,1481 1337.72,1481 1275,1543.72 1275,1590.47 v1(1255,1610.47)
  Bottom Layer - Signal w10: R12_E.1@1095,1758.19 1095,1640.47 1125,1610.47 v1(1255,1610.47)
C5_N: C9_F.1 C12_F.1 J2.18 R7_F.1 | length 4046.8
  Top Layer - Signal w10: v1(385,2425) 385,2504.09 C9_F.1@389.09,2508.19 455.79,2508.19 C12_F.1@460,2512.4
  Int. Signal w10: v1(385,2425) 365,2405 365,2316 291,2242 291,1916 337,1870 337,1656.38 266.62,1586 231,1586 102,1457 102,790 314,578 314,454 432,336 511,336 725,122 1125.72,122 1182,178.28 1182,233.46 1250.54,302 1257.64,302 1260.08,304.43 1278.93,304.43 J2.18@1288.5,314
  Bottom Layer - Signal w10: R7_F.1@95,2572.72 95,2480 180,2395 355,2395 v1(385,2425)
C5_P: C1_F.1 C2_F.1 J2.26 R12_F.1 | length 3811.6
  Top Layer - Signal w10: C1_F.1@255,2512.4 319.88,2512.4 C2_F.1@324.09,2508.19 325,2507.28 v1(325,2425)
  Int. Signal w10: v1(325,2425) 345,2405 345,2324.28 271,2250.28 271,1907.72 317,1861.72 317,1664.66 258.34,1606 239.28,1606 222.72,1606 82,1465.28 82,781.72 294,569.72 294,445.72 423.72,316 502.72,316 716.72,102 1134,102 J2.26@1234,202
  Bottom Layer - Signal w10: R12_F.1@165,2572.72 165,2455 195,2425 v1(325,2425)
C6_N: C9_G.1 C12_G.1 J2.17 R7_G.1 | length 4126.8
  Top Layer - Signal w10: C12_G.1@1377.6,3000 1381.81,2995.79 C9_G.1@1381.81,2929.09 1385.91,2925 v1(1465,2925)
  Int. Signal w10: J2.17@1397.5,314 1391.14,320.36 1391.14,345.86 1405.28,360 1795.28,360 2150,714.72 2150,1467 2073,1544 1921,1544 1637,1828 1637,2568 1580,2625 1580,2813.64 1488.64,2905 1472.07,2905 1466.21,2910.86 1466.21,2923.79 v1(1465,2925)
  Bottom Layer - Signal w10: R7_G.1@1317.28,2635 1410,2635 1495,2720 1495,2895 v1(1465,2925)
C6_P: C1_G.1 C2_G.1 J2.25 R12_G.1 | length 4071.3
  Top Layer - Signal w10: C1_G.1@1377.6,2795 1377.6,2859.88 C2_G.1@1381.81,2864.09 1382.72,2865 v1(1465,2865)
  Int. Signal w10: J2.25@1343,202 1343,326 1397,380 1787,380 2130,723 2130,1458.72 2064.72,1524 1912.72,1524 1617,1819.72 1617,2559.72 1560,2616.72 1560,2805.36 1480.36,2885 1472.07,2885 1466.21,2879.14 1466.21,2866.21 v1(1465,2865)
  Bottom Layer - Signal w10: R12_G.1@1317.28,2705 1435,2705 1465,2735 v1(1465,2865)
C7_N: C9_H.1 C12_H.1 J2.16 R7_H.1 | length 4024.1
  Top Layer - Signal w10: v1(1955,2425) 1955,2504.09 C9_H.1@1959.09,2508.19 2025.79,2508.19 C12_H.1@2030,2512.4
  Int. Signal w10: J2.16@1506.5,314 1496.93,304.43 1475.46,304.43 1451.31,280.29 1404,232.98 1404,158.08 1425.08,137 1524.28,137 1704.28,317 1829.28,317 2192,679.72 2192,1494 2096,1590 1937,1590 1683,1844 1683,2163 1794,2274 1865.28,2274 1935,2343.72 1935,2405 v1(1955,2425)
  Bottom Layer - Signal w10: R7_H.1@1665,2572.72 1665,2480 1750,2395 1925,2395 v1(1955,2425)
C7_P: C1_H.1 C2_H.1 J2.24 R12_H.1 | length 3623.9
  Top Layer - Signal w10: C1_H.1@1825,2512.4 1889.88,2512.4 C2_H.1@1894.09,2508.19 1895,2507.28 v1(1895,2425)
  Int. Signal w10: J2.24@1452,202 1445.85,195.85 1456.5,185.21 1456.5,162.86 1462.36,157 1516,157 1696,337 1821,337 2172,688 2172,1485.72 2087.72,1570 1928.72,1570 1663,1835.72 1663,2171.28 1785.72,2294 1857,2294 1915,2352 1915,2405 v1(1895,2425)
  Bottom Layer - Signal w10: R12_H.1@1735,2572.72 1735,2455 1765,2425 v1(1895,2425)
Drain_Wire_1: J2.13 R31.1 | length 373.5
  Bottom Layer - Signal w10: R31.1@687.28,360 735,360 790,415 921.29,415 967.5,461.21 1009.21,461.21 J2.13@1016,468
Drain_Wire_2: J2.28 R33.1 | length 72.1
  Bottom Layer - Signal w10: J2.28@1016,202 1016.69,201.31 1016.69,147.83 1027.24,137.28 R33.1@1030,137.28
EN_5V: R50.1 R51.1 U4.7 | length 268.7
  Top Layer - Signal w10: R51.1@1915,1847.28 1917.72,1850 1945,1850 1977.28,1882.28 R50.1@1977.28,1915 2005,1915 2035,1945 2035,1990 2025.31,1999.69 U4.7@1995,1999.69
EN_5V_J: R50.2 U5.4 | length 354
  Top Layer - Signal w10: U5.4@1595.59,1906 1623,1906 1672,1955 v1(1715,1955) ; v1(1870,1915) R50.2@1912.72,1915
  Power-GND w10: v1(1715,1955) 1795,1955 1835,1915 v1(1870,1915)
EN_CE: R52.1 R53.1 U3.7 | length 247.8
  Top Layer - Signal w10: R53.1@1737.28,2255 R52.1@1737.28,2185 1822.71,2185 v1(1847.71,2160)
  Bottom Layer - Signal w10: v1(1847.71,2160) 1852.55,2164.84 U3.7@1902.76,2164.84
EN_CE_J: R52.2 U6.4 | length 375.7
  Top Layer - Signal w10: v1(1592.11,2206.03) 1613.15,2185 R52.2@1672.72,2185
  Bottom Layer - Signal w10: v1(1592.11,2206.03) 1619.41,2178.74 U6.4@1619.41,1931
FB_1: C23.1 R25.1 R27.2 U3.3 | length 215.7
  Bottom Layer - Signal w10: U3.3@1997.24,2184.53 2072.06,2184.53 R27.2@2077.58,2179.01 R25.1@2077.58,2245.2 2136.81,2245.2 C23.1@2142.24,2250.63
FB_2: C24.1 R26.1 R28.2 U4.3 | length 225.6
  Top Layer - Signal w10: C24.1@1751.5,2059.37 1813.82,2059.37 R26.1@1820.17,2053.02 R28.2@1820.17,1990.25 ; R26.1@1822.93,2053.02 1856.58,2019.37 U4.3@1900.51,2019.37
GND: C7.2 C8.1 C17.2 C18.2 C35.1 C36.1 C37.2 C38.2 C39.2 J1.18 J1.20 TP8.0 U5.3 U6.3 U7.3 U8.3 U8.7 U9.4 | length 1835.9
  Top Layer - Signal w15: U5.3@1595.59,1824 1596,1824.41 1596,1851 1582.96,1864.04 1572.04,1864.04 v1(1571.08,1865) 1571.08,1932.08 1592.34,1953.34 1592.34,1968.8 1603.54,1980 C17.2@1604.53,1980
  Top Layer - Signal w20: v1(1720,1890) v1(1720,1855) 1720,1838.33 1745.7,1812.62 1745.7,1788.75 U7.3@1747.2,1787.25
  Top Layer - Signal w30: v1(620,2805) v1(645,2805) 703.73,2805 721.3,2787.43 721.3,2753.23 C38.2@725,2749.53 ; v1(631,2403) 646.3,2418.3 646.3,2441.77 C39.2@650,2445.47 650,2446.46 C39.2@653.7,2450.16 ; C8.1@845,2579.53 845,2580.51 848.7,2584.21 884.13,2584.21 917.52,2617.6 C7.2@925,2617.6 927.6,2615 980,2615 980.83,2614.17 ; v1(960,2455) 963,2452 v1(1011,2452) ; C36.1@1657.6,1842.69 1661.3,1846.39 C36.1@1661.3,1847.37 ; C36.1@1661.3,1848.36 1710,1897.06 v1(1710,1925) ; 980.83,2614.17 1010,2585 v1(1010,2475) v1(980,2475) 980.83,2475.83 980.83,2614.17
  Bottom Layer - Signal w10: J1.18@962,2522.06 J1.18@965,2525.06 ; J1.18@962.5,2527.56 J1.18@965,2525.06 ; J1.18@965.37,2524.69 J1.18@965,2525.06
  Bottom Layer - Signal w15: 89.65,1990 116.61,2016.97 U9.4@116.61,2025.35 ; v1(1571.08,1865) 1572.44,1865 1588.44,1849 U6.3@1619.41,1849 ; v1(1710,1925) 1710.96,1925.96 1728.71,1925.96 1737.5,1934.74 1737.5,1997.03 C18.2@1730.85,2003.68 ; U8.7@1717.2,1582.75 1717.2,1616.69 1725.99,1625.47 1759,1625.47 ; U8.3@1742.8,1687.25 1742.8,1644 1759,1627.8 1759,1625.47 ; C35.1@1830,1625.47 1759,1625.47
  Bottom Layer - Signal w30: v1(45,1990) v1(75,1990) 89.65,1990 ; v1(65,2300) v1(85,2300) C37.2@135.47,2300 ; C35.1@1830,1625.47 1830,1549.72 v1(1844.86,1534.86) ; v1@1845,1534.86 1845,1534.72 v1(1864.86,1514.86) ; v1@1865,1515 1884.86,1495.14 v1(1884.86,1494.86)
  other v1: 984,2452
GND_Cryostat_1: C29.2 C30.2 C34.2 J2.6 R32.1 | length 347.3
  Bottom Layer - Signal w10: C29.2@864.53,715 864.53,657.76 866.81,655.47 C30.2@935,655.47 ; R32.1@867.28,655 867.28,652.24 928.62,590.91 950.59,590.91 J2.6@961.5,580 972.41,590.91 972.41,626.93 985.79,640.31 985.79,641.3 999.49,655 C34.2@1000.47,655
GND_Cryostat_2: C31.2 C32.2 C33.2 J2.21 R34.1 | length 594.8
  Bottom Layer - Signal w10: C31.2@825.47,135 826.46,135 840.16,148.7 840.16,149.69 850,159.53 850,235 884.05,269.05 916.55,269.05 J2.21@961.5,314 ; C33.2@914.53,380 915.51,380 950.59,344.92 950.59,324.91 J2.21@961.5,314 ; R34.1@960,137.28 961.5,138.78 J2.21@961.5,314 ; C32.2@985.47,380 984.49,380 970.79,366.3 970.79,323.29 J2.21@961.5,314
GPIO_P0: U5.1 U9.1 | length 1961.2
  Top Layer - Signal w10: v1(1510,1745) 1544.41,1779.41 U5.1@1544.41,1824
  AGND-D.Sig. w10: v1(240,1965) 291,1965 335,1921 335,1617 425,1527 1333,1527 1338,1522 v1(1363,1522)
  Int. Signal w10: v1(1363,1522) 1363,1559 1510,1706 v1(1510,1745)
  Bottom Layer - Signal w10: U9.1@193.39,2025.35 194.19,2024.55 194.19,1977.02 206.21,1965 v1(240,1965)
GPIO_P1: U6.1 U9.2 | length 2203.6
  Top Layer - Signal w10: v1(1600,1521) 1600,1762.52 1611.08,1773.6 v1(1611.08,1776.31)
  AGND-D.Sig. w10: v1(215,1935) 316,1834 316,1583 397,1502 1581,1502 v1(1600,1521)
  Bottom Layer - Signal w10: U9.2@167.8,2025.35 168.58,2024.57 168.58,1981.42 v1(215,1935) ; v1(1611.08,1776.31) 1640.36,1776.31 1670.59,1806.54 U6.1@1670.59,1849
INN_5V: C3_A.2 C3_B.2 C3_C.2 C3_D.2 C3_E.2 C3_F.2 C3_G.2 C3_H.2 C4_A.2 C4_B.2 C4_C.2 C4_D.2 C4_E.2 C4_F.2 C4_G.2 C4_H.2 C30.1 C33.1 D2.2 R1_A.2 R1_B.2 R1_C.2 R1_D.2 R1_E.2 R1_F.2 R1_G.2 R1_H.2 R45.2 TP6.0 U1_A.8 U1_B.8 U1_C.8 U1_D.8 U1_E.8 U1_F.8 U1_G.8 U1_H.8 U2_A.8 U2_B.8 U2_C.8 U2_D.8 U2_E.8 U2_F.8 U2_G.8 U2_H.8 U7.2 | length 8369.5
  Top Layer - Signal w10: C3_F.2@175,2629.53 C4_F.2@175,2695.47 204.06,2695.47 229.57,2720.98 278.61,2720.98 289.01,2710.59 381.77,2710.59 395.75,2724.57 395.75,2759.29 U1_F.8@397.48,2761.02 ; C4_B.2@199.53,1060 C4_B.2@200,1060.47 ; C3_B.2@200,994.53 C4_B.2@200,1060.47 ; U1_B.8@422.48,1126.02 420.75,1124.29 420.75,1089.57 406.77,1075.59 314.01,1075.59 303.61,1085.98 254.57,1085.98 229.06,1060.47 C4_B.2@200,1060.47 ; C3_A.2@464.53,1815 C3_A.2@465,1814.53 C4_A.2@465,1880.47 494.06,1880.47 519.57,1905.98 568.61,1905.98 579.01,1895.59 671.77,1895.59 685.75,1909.57 685.75,1944.29 U1_A.8@687.48,1946.02 ; C4_C.2@959.53,1060 C4_C.2@960,1060.47 ; C3_C.2@960,994.53 C4_C.2@960,1060.47 ; C3_E.2@1105,1815 C4_E.2@1105,1880.95 1134.06,1880.95 1159.57,1906.46 1208.61,1906.46 1219.01,1896.06 1311.77,1896.06 1325.75,1910.04 1325.75,1944.76 U1_E.8@1327.48,1946.5 ; U1_G.8@1128.98,2937.48 1130.71,2935.75 1165.43,2935.75 1179.41,2921.77 1179.41,2829.01 1169.02,2818.61 1169.02,2769.57 1194.53,2744.06 C4_G.2@1194.53,2715 ; U1_C.8@1182.48,1126.02 1180.75,1124.29 1180.75,1089.57 1166.77,1075.59 1074.01,1075.59 1063.61,1085.98 1014.57,1085.98 989.06,1060.47 C4_C.2@960,1060.47 ; C4_G.2@1195.51,2715 C4_G.2@1194.53,2715 ; 1259.4,2659.4 1260,2660 ; C3_G.2@1260.47,2715 C4_G.2@1194.53,2715 ; C4_D.2@1719.53,1060 C4_D.2@1720,1060.47 ; C3_D.2@1720,994.53 C4_D.2@1720,1060.47 ; C3_H.2@1745,2629.53 C4_H.2@1745,2695.47 1774.06,2695.47 1799.57,2720.98 1848.61,2720.98 1859.01,2710.59 1951.77,2710.59 1965.75,2724.57 1965.75,2759.29 U1_H.8@1967.48,2761.02 ; U7.2@1772.8,1787.25 1776.3,1783.75 1776.3,1766.95 1788.24,1755 1815,1755 1821.02,1761.02 1821.02,1768.31 1830,1777.29 v1(1830,1780) ; R45.2@1817.28,1852.24 R45.2@1817.28,1855 ; R45.2@1822.28,1857.24 R45.2@1822.28,1860 ; U1_D.8@1942.48,1126.02 1940.75,1124.29 1940.75,1089.57 1926.77,1075.59 1834.01,1075.59 1823.61,1085.98 1774.57,1085.98 1749.06,1060.47 C4_D.2@1720,1060.47 ; D2.2@1945,1556.5 1945,1594.64 1958.44,1608.09 1978.09,1608.09 v1(1980,1610)
  Top Layer - Signal w20: v1(47.5,2607.5) v1(47.5,2637.5) v1(47.5,2667.5) 75.47,2695.47 C4_F.2@175,2695.47 ; v1(55,1000) v1(55,1030) v1(55,1060) C4_B.2@199.53,1060 ; v1(428,1659) 421,1666 v1(421,1716) 421,1771.07 440.09,1790.16 441.61,1790.16 456.3,1804.84 456.3,1806.77 C3_A.2@464.53,1815 ; v1(815,1000) v1(815,1030) v1(815,1060) C4_C.2@959.53,1060 ; v1(909,1610) v1(958,1610) 975,1610 1050,1685 1050,1865 1065.95,1880.95 C4_E.2@1105,1880.95 ; C4_G.2@1195.51,2715 1251.11,2659.4 1259.4,2659.4 ; 1260,2660 1420,2660 1445,2635 v1(1455,2635) v1(1485,2635) v1(1485,2665) ; v1(1585,1000) v1(1585,1060) C4_D.2@1719.53,1060 ; v1(1705,2380) v1(1675,2380) v1(1675,2410) 1675,2460 1695,2480 1695,2610 1714.53,2629.53 C3_H.2@1745,2629.53
  Power-GND w10: v1(1860,1810) 1862.71,1810 1878.76,1793.94 1891.06,1793.94 1900,1785 1900,1730 1980,1650 v1(1980,1610)
  Bottom Layer - Signal w10: v1(210,2700) 230.61,2720.61 255.61,2720.61 323.98,2788.98 364.49,2788.98 378.72,2803.21 378.72,2809.74 378.46,2810 380,2811.54 380,2820 380.2,2820.2 U2_F.8@380.2,2839.41 ; v1(235,1065) 255.61,1085.61 278.89,1085.61 347.26,1153.98 389.49,1153.98 403.72,1168.21 403.72,1174.74 403.46,1175 405,1176.54 405,1185 405.2,1185.2 U2_B.8@405.2,1204.41 ; v1(500,1885) 520.61,1905.61 546.46,1905.61 614.83,1973.98 654.49,1973.98 668.72,1988.21 668.72,1994.74 668.46,1995 670,1996.54 670,2005 670.2,2005.2 U2_A.8@670.2,2024.41 ; v1(800,350) 801.91,351.91 801.91,361.91 820,380 C33.1@855.47,380 ; v1(865,770) 910,770 935,745 C30.1@935,714.53 ; v1(995,1065) 1015.61,1085.61 1038.89,1085.61 1107.26,1153.98 1149.49,1153.98 1163.72,1168.21 1163.72,1174.74 1163.46,1175 1165,1176.54 1165,1185 1165.2,1185.2 U2_C.8@1165.2,1204.41 ; v1@1005,3157.29 1010,3162.29 v1(1010,3165) ; U2_G.8@1050.59,2920.2 1069.8,2920.2 1070,2920 1078.46,2920 1080,2918.46 1080.26,2918.72 1086.79,2918.72 1101.02,2904.49 1101.02,2863.98 1169.39,2795.61 1169.39,2770.61 v1(1190,2750) ; v1(1140,1885.47) 1160.61,1906.08 1183.89,1906.08 1252.26,1974.45 1294.49,1974.45 1308.72,1988.68 1308.72,1995.22 1308.46,1995.47 1310,1997.01 1310,2005.47 1310.2,2005.67 U2_E.8@1310.2,2024.88 ; R1_E.2@1492.28,2070.47 R1_E.2@1492.76,2070 ; v1(1755,1065) 1775.61,1085.61 1798.89,1085.61 1867.26,1153.98 1909.49,1153.98 1923.72,1168.21 1923.72,1174.74 1923.46,1175 1925,1176.54 1925,1185 1925.2,1185.2 U2_D.8@1925.2,1204.41 ; v1(1780,2700) 1800.61,2720.61 1830.61,2720.61 1898.98,2788.98 1934.49,2788.98 1948.72,2803.21 1948.72,2809.74 1948.46,2810 1950,2811.54 1950,2820 1950.2,2820.2 U2_H.8@1950.2,2839.41
  Bottom Layer - Signal w20: R1_F.2@562.28,2885 562.28,2882.24 567.83,2876.69 590.31,2876.69 v1@609,2858 ; R1_B.2@587.28,1250 v1(670,1250) v1(670,1220) ; v1(606,2861) 616,2851 v1(639,2851) ; R1_A.2@852.28,2070 961,2070 v1(986,2095) v1(986,2125) ; v1(980,3165) v1(1010,3165) ; R1_G.2@1005,3102.28 v1@1005,3157.29 ; R1_C.2@1347.28,1250 v1(1464,1250) ; R1_E.2@1492.76,2070 v1(1555,2070) v1(1555,2040) ; R1_D.2@2107.28,1250 v1(2215,1250) v1(2215,1220) ; R1_H.2@2132.28,2885 v1(2200,2885) v1(2200,2855)
  other v1: 1585,1030 1428,1250 933,1610 421,1689 1860,1780 1830,1810 1860,1840 1860,1870
INN_CE: C32.1 C34.1 J2.5 J2.20 R44.2 TP5.0 U8.2 | length 2174
  Bottom Layer - Signal w10: C32.1@1045.51,380 C32.1@1044.53,380 1044.53,346.3 1070.5,320.33 J2.20@1070.5,314 ; C34.1@1059.53,655 1070.5,644.03 J2.5@1070.5,580 ; R44.2@1672.72,1745 1670,1742.28 1670,1665 1685,1650 1704.14,1650 1713.7,1659.56 1713.7,1683.75 U8.2@1717.2,1687.25
  Bottom Layer - Signal w30: J2.20@1070.5,314 1077.58,321.08 1077.58,344.65 1083,350.07 1083,434.34 1071.5,445.84 1071.5,490.16 1083,501.66 1083,557.49 1070.5,569.99 J2.5@1070.5,580 1180.5,690 1325,690 1539,904 1539,1605 ; TP5.0@1508,1605 1539,1605 ; R44.2@1672.72,1745 1672.72,1747.76 1672.17,1748.31 1656.19,1748.31 1654.5,1750 1625.5,1750 1597.67,1722.17 1597.17,1722.17 1539,1664 1539,1605
INP0: C40_A.2 C41_A.1 J1.24 | length 788.5
  Top Layer - Signal w10: C41_A.1@790.53,2191 C40_A.2@852.4,2191 ; v1(820,2286) 864,2242 C40_A.2@864,2202.6
  Int. Signal w10: v1(820,2286) 773,2286 725,2334 725,2415 740,2430 1043.14,2430 1049,2435.86 v1(1049,2461)
  Bottom Layer - Signal w10: J1.24@1037.5,2527.56 1037.5,2475.21 1049,2463.71 v1(1049,2461)
INP1: C40_B.2 C41_B.1 J1.28 | length 2073.2
  Top Layer - Signal w10: C41_B.1@525,1371.53 525.53,1371 587.4,1371 599,1382.6 598,1383.6 v1(598,1457)
  Int. Signal w10: v1(598,1457) 510,1545 455,1545 360,1640 360,2125 317,2168 317,2204 650,2537 1041,2537 1087,2491 v1(1087,2461)
  Bottom Layer - Signal w10: v1(1087,2461) 1087.25,2461.25 1087.25,2527.31 J1.28@1087.5,2527.56
INP2: C40_C.2 C41_C.1 J1.32 | length 1860.5
  Top Layer - Signal w10: C41_C.1@1285.53,1371 C40_C.2@1347.4,1371 ; C40_C.2@1357,1371.53 1358,1372.53 v1(1358,1448)
  Int. Signal w10: v1(1070,2585) 1090,2585 1110,2565 1110,2449.64 1095.36,2435 1080,2435 1065,2420 1065,2245 1040,2220 989.17,2220 925,2155.83 925,1673 1058,1540 1179,1540 1301,1418 1328,1418 v1(1358,1448)
  Bottom Layer - Signal w10: v1(1070,2585) 1072.71,2585 1083.72,2573.98 1131.63,2573.98 1137.48,2568.13 J1.32@1137.5,2527.56